# Altium PCB PCB1.PcbDoc (part 2 of 2)
Units mm, origin at the board's own origin, x right, y up, seen from the top; angles counter-clockwise.
Board outline 55 x 45 mm, 2 copper layers (Top Layer, Bottom Layer); 82 components, 65 nets, 333 pads, 91 vias.
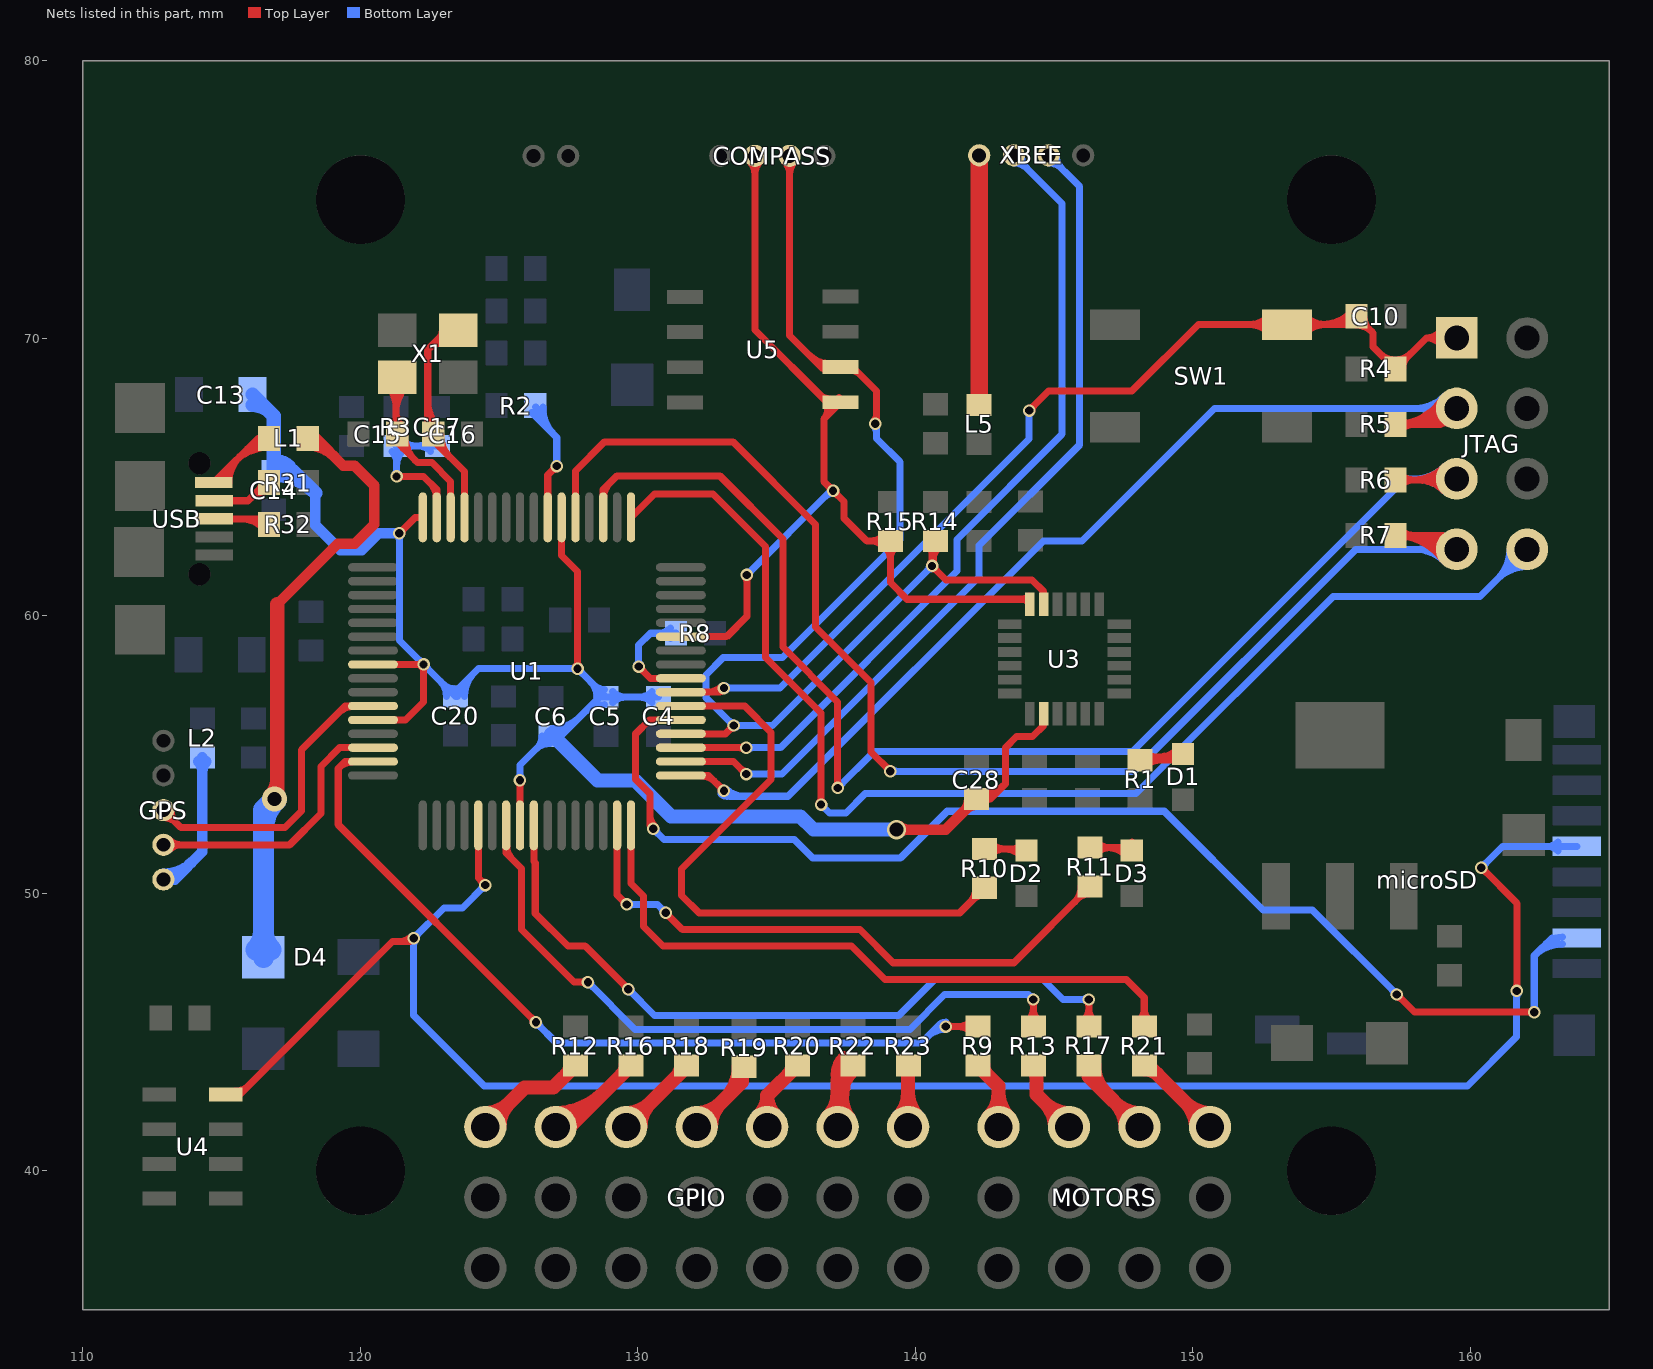
[diagram p2: the nets of this part, all layers, seen from the top]

## Via types
v1: diameter 0.45, hole 0.3, Top Layer to Bottom Layer, 69 vias
v2: diameter 0.7, hole 0.4, Top Layer to Bottom Layer, 17 vias
v3: diameter 1.27, hole 0.762, Top Layer to Bottom Layer, 1 vias
v4: diameter 1.3, hole 0.6, Top Layer to Bottom Layer, 1 vias
v5: diameter 0.9, hole 0.5, Top Layer to Bottom Layer, 1 vias
v6: diameter 0.9, hole 0.6, Top Layer to Bottom Layer, 1 vias
v7: diameter 0.7, hole 0.5, Top Layer to Bottom Layer, 1 vias

## Nets (pads, with @x,y where several pads share a name; then routed paths per layer and width w, separated by ;. In a path a pad name is that pad's centre, name@x,y a point inside that pad or via, vN(x,y) a via of type N, cw(c..) or ccw(c..) an arc to the next point about the centre after c; other vN are vias at no path point) (continued)
NetD1_2: D1.2 R1.2 | length 5.2
  Top Layer w0.254: R1.2@148.1,54.8 D1.2@149.425,54.8 ; R1.2@148.287,55.036 ccw(c148.748,55.835) 148.986,54.944 ; R1.2@148.343,54.607 cw(c148.809,54.141) 148.809,54.8 cw(c148.809,55.459) R1.2@148.343,54.993 ; R1.2@148.386,54.663 cw(c148.729,54.466) 148.627,54.848 ; R1.2@148.448,54.8 ccw(c148.448,56.227) D1.2@149.457,55.218 ; 149.061,54.8 ccw(c149.061,55.614) D1.2@149.637,55.038
NetD2_2: D2.2 R10.2 | length 3.4
  Top Layer w0.254: R10.2@142.5,51.6 D2.2@143.8,51.6 ; R10.2@142.743,51.407 cw(c143.209,50.941) 143.209,51.6 cw(c143.209,52.259) R10.2@142.743,51.793 ; 143.22,51.6 cw(c143.22,50.77) D2.2@143.807,51.357 ; 143.462,51.6 ccw(c143.462,52.088) D2.2@143.807,51.743
NetD3_2: D3.2 R11.2 | length 3.7
  Top Layer w0.254: R11.2@146.3,51.65 147.6,51.65 D3.2@147.8,51.85 ; R11.2@146.543,51.457 cw(c147.009,50.991) 147.009,51.65 cw(c147.009,52.309) R11.2@146.543,51.843 ; 146.899,51.65 cw(c146.899,50.649) D3.2@147.607,51.357 ; 147.382,51.65 ccw(c147.382,51.968) D3.2@147.607,51.743
NetD4_1: D4.1 L1.2 | length 26.5
  Top Layer w0.381: 117,60.422 119.178,62.6 119.8,62.6 120.5,63.3 120.5,64.7 119.784,65.416 119.385,65.416 118.4,66.4 L1.2@118.1,66.4 ; L1.2@118.1,66.141 cw(c118.1,64.79) 119.055,65.745
  Top Layer w0.508: v5@116.761,53.539 ccw(c116.185,54.115) 117,54.115 ; v5(116.9,53.4) 117,53.5 117,60.422
  Bottom Layer w0.762: D4.1@116.231,47.969 ccw(c115.58,48.62) 116.5,48.62 ccw(c117.42,48.62) D4.1@116.769,47.969 ; D4.1@116.5,47.7 116.5,53 v5(116.9,53.4) ; 116.5,52.268 cw(c118.032,52.268) v5@116.949,53.351
NetL1_1: L1.1 USB.1 | length 6.6
  Top Layer w0.254: USB.1@114.708,64.802 116.306,66.4 L1.1@116.7,66.4 ; USB.1@114.748,64.802 cw(c114.845,64.802) USB.1@114.776,64.87 ; USB.1@115.002,64.802 cw(c115.712,64.802) 115.21,65.304 ; USB.1@115.256,64.802 cw(c116.579,64.802) 115.643,65.737 ; 115.476,65.57 cw(c116.7,64.346) L1.1@116.7,66.077 ; 115.91,66.004 cw(c116.7,65.213) L1.1@116.7,66.331
NetL2_1: GPS.1 L2.1 | length 7.2
  Bottom Layer w0.381: GPS.1@112.9,50.5 113.3,50.5 114.3,51.5 L2.1@114.3,54.9 ; GPS.1@112.9,50.709 ccw(c112.9,52.181) 113.94,51.14 ; L2.1@114.152,54.752 cw(c113.794,54.394) 114.3,54.394 cw(c114.806,54.394) L2.1@114.448,54.752
NetL5_1: L5.1 XBEE.1 | length 9
  Top Layer w0.635: L5.1@142.3,67.6 XBEE.1@142.3,76.6
NetP1_2: R31.1 USB.2 | length 3.5
  Top Layer w0.254: USB.2@114.725,64.15 115.95,64.15 116.6,64.8 R31.1@116.9,64.8 ; 115.978,64.178 cw(c116.7,63.456) R31.1@116.7,64.477 ; R31.1@116.34,64.54 ccw(c116.13,64.75) R31.1@116.427,64.75
NetP1_3: R32.1 USB.3 | length 3.7
  Top Layer w0.254: USB.3@114.725,63.5 116.6,63.5 R32.1@116.9,63.2 ; 115.679,63.5 cw(c115.679,62.329) R32.1@116.507,63.157 ; 116.292,63.5 cw(c116.292,62.942) R32.1@116.687,63.337
NetP6_3: GPIO.3 R12.2 | length 6.5
  Top Layer w0.508: GPIO.3@124.5,41.58 125.92,43 126.95,43 R12.2@127.75,43.8 ; GPIO.3@124.5,42.088 ccw(c124.5,43.314) 125.367,42.447 ccw(c126.234,41.58) GPIO.3@125.008,41.58 ; R12.2@127.415,43.465 ccw(c127.081,43.8) R12.2@127.554,43.8
NetP6_6: GPIO.6 R16.2 | length 6.8
  Top Layer w0.508: GPIO.6@127.04,42.088 ccw(c127.04,44.497) 128.744,42.794 ; 127.877,41.927 cw(c127.04,42.763) GPIO.6@127.04,41.58 127.53,41.58 R16.2@129.75,43.8 ; R16.2@129.415,43.465 ccw(c129.081,43.8) R16.2@129.554,43.8
NetP6_9: GPIO.9 R18.2 | length 5.5
  Top Layer w0.508: GPIO.9@129.58,41.58 131.75,43.75 R18.2@131.75,43.8 ; GPIO.9@129.58,42.088 ccw(c129.58,43.314) 130.447,42.447 ccw(c131.314,41.58) GPIO.9@130.088,41.58 ; 131.38,43.38 ccw(c130.96,43.8) R18.2@131.554,43.8
NetP6_12: GPIO.12 R19.2 | length 6.4
  Top Layer w0.508: GPIO.12@132.12,41.58 133.75,43.21 133.75,43.67 R19.2@133.83,43.75 ; GPIO.12@132.12,42.088 ccw(c132.12,43.314) 132.987,42.447 ccw(c133.854,41.58) GPIO.12@132.628,41.58 ; 133.17,42.63 ccw(c132.05,43.75) R19.2@133.634,43.75 ; 133.75,43.325 cw(c134.205,43.325) R19.2@133.883,43.647
NetP6_15: GPIO.15 R20.2 | length 4.7
  Top Layer w0.508: GPIO.15@134.323,41.96 ccw(c133.657,42.71) 134.66,42.71 ; GPIO.15@134.66,41.58 134.66,42.71 ; GPIO.15@134.997,41.96 cw(c135.663,42.71) 134.66,42.71 ; R20.2@135.415,43.465 ccw(c135.081,43.8) R20.2@135.554,43.8 ; R20.2@135.75,43.8 134.66,42.71
NetP6_18: GPIO.18 R22.2 | length 9.5
  Top Layer w0.508: GPIO.18@136.841,41.939 ccw(c135.974,42.806) 137.2,42.806 ccw(c138.426,42.806) GPIO.18@137.559,41.939 ; GPIO.18@136.946,42.02 ccw(c136.625,42.577) 137.246,42.41 ; GPIO.18@137.2,41.58 137.2,43.25 R22.2@137.75,43.8 ; GPIO.18@137.2,42.24 cw(c139.26,42.24) R22.2@137.803,43.697 ; 137.2,43.057 cw(c137.805,43.057) R22.2@137.72,43.655 ; 137.2,43.467 cw(c138.033,43.467) R22.2@137.444,44.056 ; 137.399,42.984 ccw(c138.647,42.65) GPIO.18@137.608,41.882 ; R22.2@137.415,43.465 ccw(c137.081,43.8) R22.2@137.554,43.8
NetP6_21: GPIO.21 R23.2 | length 4.1
  Top Layer w0.508: GPIO.21@139.381,41.939 ccw(c138.514,42.806) 139.74,42.806 ccw(c140.966,42.806) GPIO.21@140.099,41.939 ; GPIO.21@139.74,41.58 R23.2@139.74,43.79
NetP7_3: MOTORS.3 R9.2 | length 4.8
  Top Layer w0.508: R9.2@142.25,43.8 143,43.05 MOTORS.3@143,41.58 ; R9.2@142.446,43.8 ccw(c142.919,43.8) R9.2@142.585,43.465 ; MOTORS.3@142.641,41.939 ccw(c141.774,42.806) 143,42.806 ccw(c144.226,42.806) MOTORS.3@143.359,41.939
NetP7_6: MOTORS.6 R13.2 | length 5.3
  Top Layer w0.508: R13.2@144.197,43.697 cw(c143.779,43.279) 144.37,43.279 ; R13.2@144.37,43.68 144.37,42.75 MOTORS.6@145.54,41.58 MOTORS.6@145.17,41.58 ; MOTORS.6@145.032,41.58 ccw(c143.806,41.58) 144.673,42.447 ccw(c145.54,43.314) MOTORS.6@145.54,42.088
NetP7_9: MOTORS.9 R17.2 | length 6
  Top Layer w0.508: R17.2@146.25,43.8 146.25,43.41 MOTORS.9@148.08,41.58 ; R17.2@146.446,43.8 ccw(c147.861,43.8) 146.86,42.8 ; MOTORS.9@147.572,41.58 ccw(c146.346,41.58) 147.213,42.447 ccw(c148.08,43.314) MOTORS.9@148.08,42.088
NetP7_12: MOTORS.12 R21.2 | length 5.5
  Top Layer w0.508: R21.2@148.3,43.654 cw(c148.3,43.06) 148.72,43.48 ; R21.2@148.4,43.8 MOTORS.12@150.62,41.58 ; MOTORS.12@150.112,41.58 ccw(c148.886,41.58) 149.753,42.447 ccw(c150.62,43.314) MOTORS.12@150.62,42.088
NetR2_2: R2.2 U1.55 | length 6.8
  Top Layer w0.254: U1.55@126.75,63.55 126.75,65.075 v1(127.075,65.4) ; v1@126.977,65.4 cw(c126.74,65.4) 126.908,65.233 cw(c127.075,65.065) v1@127.075,65.302
  Bottom Layer w0.254: R2.2@126.163,67.338 127.075,66.425 v1(127.075,65.4) ; R2.2@126.319,67.525 ccw(c127.15,67.525) 126.562,66.938 ; R2.2@126.573,67.525 ccw(c128.017,67.525) 126.996,66.504 ; v1@127.006,65.469 ccw(c126.838,65.637) 127.075,65.637 ccw(c127.312,65.637) v1@127.144,65.469
NetR8_2: R8.2 U1.40 | length 5.8
  Top Layer w0.254: v1@130.025,58.077 cw(c130.025,57.84) 130.192,58.008 cw(c130.36,58.175) v1@130.123,58.175 ; v1(130.025,58.175) 130.45,57.75 U1.40@131.55,57.75
  Bottom Layer w0.254: v1@129.956,58.244 ccw(c129.788,58.412) 130.025,58.412 ccw(c130.262,58.412) v1@130.094,58.244 ; v1(130.025,58.175) 130.025,58.95 130.45,59.375 R8.2@131.375,59.375 ; R8.2@131.182,59.182 ccw(c130.716,58.716) 130.716,59.375 ccw(c130.716,60.034) R8.2@131.182,59.568
NRST: C10.2 JTAG.1 R4.1 SW1.3 U1.39 | length 46.5
  Top Layer w0.254: U1.39@131.55,57.25 132.95,57.25 v1(133.1,57.4) ; 132.501,57.25 ccw(c132.501,57.999) v1@133.031,57.469 ; v1(144.1,67.4) 144.8,68.1 147.8,68.1 150.2,70.5 SW1.3@153.4,70.5 C10.2@155.6,70.5 ; v1@144.1,67.498 ccw(c144.1,67.735) 144.267,67.567 ccw(c144.435,67.4) v1@144.198,67.4 ; SW1.3@152.751,70.201 ccw(c152.029,69.479) 152.029,70.5 ccw(c152.029,71.521) SW1.3@152.751,70.799 ; SW1.3@154.049,70.201 cw(c154.771,69.479) 154.771,70.5 cw(c154.771,71.521) SW1.3@154.049,70.799 ; 154.637,70.5 ccw(c154.637,72.013) C10.2@155.707,70.943 ; 155.251,70.5 ccw(c155.251,71.399) C10.2@155.887,70.763 ; C10.2@155.9,70.477 cw(c155.9,69.697) 156.451,70.249 ; C10.2@155.9,70.8 156.5,70.2 156.5,69.7 R4.1@157.3,68.9 158.42,70.02 ; C10.2@156.173,70.75 ccw(c156.711,70.75) 156.331,70.369 ; 156.749,69.451 ccw(c157.3,70.003) 157.3,69.223 ccw(c157.3,70.003) 157.851,69.451 ; 156.869,69.331 cw(c156.489,68.95) R4.1@157.027,68.95 ; R4.1@157.573,68.95 cw(c158.111,68.95) 157.731,69.331 ; JTAG.1@158.976,69.703 ccw(c158.42,69.374) 158.42,70.02 ; JTAG.1@158.976,70.337 cw(c158.42,70.666) 158.42,70.02 ; JTAG.1@159.512,70.02 158.42,70.02
  Bottom Layer w0.254: v1(133.1,57.4) 135.124,57.4 144.1,66.376 v1(144.1,67.4) ; v1@133.169,57.331 cw(c133.337,57.163) 133.337,57.4 cw(c133.337,57.637) v1@133.169,57.469 ; v1@144.031,67.331 cw(c143.863,67.163) 144.1,67.163 cw(c144.337,67.163) v1@144.169,67.331
PA7: R10.1 U1.38 | length 23.6
  Top Layer w0.254: U1.38@131.55,56.75 133.85,56.75 134.8,55.8 134.8,54.1 131.572,50.872 131.572,49.928 132.2,49.3 141.6,49.3 R10.1@142.5,50.2 R10.1@142.3,50.2 ; 141.949,49.649 ccw(c141.397,50.2) R10.1@142.177,50.2 ; 142.069,49.769 cw(c142.45,49.389) R10.1@142.45,49.927
PA8: R11.1 U1.31 | length 24.2
  Top Layer w0.254: U1.31@129.25,52.45 129.25,49.95 v1(129.6,49.6) ; v1@129.502,49.6 ccw(c129.265,49.6) 129.433,49.767 ccw(c129.6,49.935) v1@129.6,49.698 ; v1@131,49.202 cw(c131,48.965) 131.167,49.133 cw(c131.335,49.3) v1@131.098,49.3 ; v1(131,49.3) 131.6,48.7 138,48.7 139.2,47.5 143.55,47.5 R11.1@146.3,50.25 ; 145.749,49.699 ccw(c145.197,50.25) R11.1@145.977,50.25 ; 145.869,49.819 cw(c146.25,49.439) R11.1@146.25,49.977
  Bottom Layer w0.254: v1(129.6,49.6) 130.7,49.6 v1(131,49.3) ; v1@129.669,49.531 cw(c129.837,49.363) 129.837,49.6 cw(c129.837,49.837) v1@129.669,49.669 ; v1@130.902,49.3 ccw(c130.665,49.3) 130.833,49.467 ccw(c131,49.635) v1@131,49.398
PA27: microSD.1 U1.37 | length 48.5
  Top Layer w0.254: 130.429,52.867 ccw(c131.099,52.867) v1@130.625,52.393 ; v1(130.556,52.324) 130.429,52.451 130.429,53.594 129.921,54.102 129.921,55.753 130.418,56.25 U1.37@131.55,56.25 ; v1@157.353,46.257 cw(c157.353,46.02) 157.52,46.188 cw(c157.688,46.355) v1@157.451,46.355 ; v1(157.353,46.355) 157.988,45.72 v1(162.306,45.72) ; v1@162.237,45.651 ccw(c162.069,45.483) 162.069,45.72 ccw(c162.069,45.957) v1@162.237,45.789
  Bottom Layer w0.254: v1@130.556,52.226 cw(c130.556,51.989) 130.723,52.157 cw(c130.891,52.324) v1@130.654,52.324 ; v1(130.556,52.324) 130.937,51.943 135.636,51.943 136.296,51.283 139.471,51.283 141.148,52.959 148.971,52.959 152.527,49.403 154.305,49.403 v1(157.353,46.355) ; v1@157.255,46.355 ccw(c157.018,46.355) 157.186,46.522 ccw(c157.353,46.69) v1@157.353,46.453 ; v1@162.237,45.789 ccw(c162.069,45.957) 162.306,45.957 ccw(c162.543,45.957) v1@162.375,45.789 ; v1(162.306,45.72) 162.306,47.752 ; 162.738,48.184 cw(c163.313,47.608) microSD.1@163.316,48.422 ; 162.945,48.391 162.306,47.752 ; microSD.1@163.315,48.168 ccw(c163.31,46.748) 162.306,47.752
PLLRC: C17.2 R3.2 U1.63 | length 9.5
  Top Layer w0.254: v1(121.3,65.025) 122.275,65.025 122.75,64.55 U1.63@122.75,63.55 ; v1@121.369,64.956 cw(c121.537,64.788) 121.537,65.025 cw(c121.537,65.262) v1@121.369,65.094 ; 122.534,64.766 cw(c122.068,64.3) U1.63@122.727,64.3
  Bottom Layer w0.254: R3.2@121.132,65.932 cw(c120.726,65.526) 121.3,65.526 ; v1@121.231,65.094 ccw(c121.063,65.262) 121.3,65.262 ccw(c121.537,65.262) v1@121.369,65.094 ; R3.2@121.275,66.125 C17.2@122.775,66.125 ; v1(121.3,65.025) R3.2@121.3,66 ; 121.3,65.406 cw(c122.044,65.406) 121.518,65.932 cw(c121.984,65.466) 121.984,66.125 cw(c121.984,66.784) R3.2@121.518,66.318 ; C17.2@122.532,65.932 ccw(c122.066,65.466) 122.066,66.125 ccw(c122.066,66.784) C17.2@122.532,66.318
PWM0: R9.1 U1.15 | length 34
  Top Layer w0.254: 119.234,54.534 cw(c119.7,54.068) U1.15@119.7,54.727 ; U1.15@120.45,54.75 119.45,54.75 119.2,54.5 119.2,52.475 v1(126.325,45.35) ; v1@126.227,45.35 ccw(c125.99,45.35) 126.158,45.517 ccw(c126.325,45.685) v1@126.325,45.448 ; v1(141.1,45.2) R9.1@142.25,45.2 ; v1@141.169,45.131 cw(c141.337,44.963) 141.337,45.2 cw(c141.337,45.437) v1@141.169,45.269 ; R9.1@142.007,45.007 ccw(c141.541,44.541) 141.541,45.2 ccw(c141.541,45.859) R9.1@142.007,45.393
  Bottom Layer w0.254: v1@126.325,45.252 cw(c126.325,45.015) 126.492,45.183 cw(c126.66,45.35) v1@126.423,45.35 ; v1(126.325,45.35) 127.075,44.6 140.2,44.6 140.8,45.2 v1(141.1,45.2) ; 140.421,44.821 cw(c141.1,44.141) v1@141.1,45.102 ; 140.854,45.254 cw(c141.1,45.008) v1@141.1,45.356 ; v1@141.031,45.131 ccw(c140.863,44.963) 140.863,45.2 ccw(c140.863,45.437) v1@141.031,45.269
PWM1: R13.1 U1.23 | length 28.5
  Top Layer w0.254: U1.23@125.25,52.45 125.25,51.45 125.8,50.9 125.8,48.7 127.7,46.8 v1(128.2,46.8) ; U1.23@125.273,51.7 ccw(c125.932,51.7) 125.466,51.234 ; v1@128.131,46.731 ccw(c127.963,46.563) 127.963,46.8 ccw(c127.963,47.037) v1@128.131,46.869 ; R13.1@144.057,45.393 ccw(c143.591,45.859) 144.25,45.859 ccw(c144.909,45.859) R13.1@144.443,45.393 ; v1@144.181,46.106 cw(c144.013,45.938) 144.25,45.938 cw(c144.487,45.938) v1@144.319,46.106 ; R13.1@144.25,45.2 v1(144.25,46.175)
  Bottom Layer w0.254: v1@128.2,46.702 cw(c128.2,46.465) 128.367,46.633 cw(c128.535,46.8) v1@128.298,46.8 ; v1(128.2,46.8) 129.9,45.1 139.8,45.1 141.055,46.355 144.07,46.355 v1(144.25,46.175) ; v1@144.152,46.175 ccw(c143.915,46.175) 144.083,46.342 ccw(c144.25,46.51) v1@144.25,46.273
PWM2: R17.1 U1.25 | length 29
  Top Layer w0.254: U1.25@126.25,52.45 126.25,51.15 126.3,51.1 126.3,49.275 127.475,48.1 128.1,48.1 v1(129.65,46.55) ; v1@129.552,46.55 ccw(c129.315,46.55) 129.483,46.717 ccw(c129.65,46.885) v1@129.65,46.648 ; R17.1@146.057,45.393 ccw(c145.591,45.859) 146.25,45.859 ccw(c146.909,45.859) R17.1@146.443,45.393 ; v1@146.181,46.106 cw(c146.013,45.938) 146.25,45.938 cw(c146.487,45.938) v1@146.319,46.106 ; R17.1@146.25,45.2 v1(146.25,46.175)
  Bottom Layer w0.254: v1@129.65,46.452 cw(c129.65,46.215) 129.817,46.383 cw(c129.985,46.55) v1@129.748,46.55 ; v1(129.65,46.55) 130.6,45.6 139.4,45.6 140.7,46.9 144.6,46.9 145.325,46.175 v1(146.25,46.175) ; v1@146.181,46.106 ccw(c146.013,45.938) 146.013,46.175 ccw(c146.013,46.412) v1@146.181,46.244
PWM3: R21.1 U1.32 | length 25
  Top Layer w0.254: U1.32@129.75,52.45 129.75,50.35 130.2,49.9 130.2,48.8 130.9,48.1 137.7,48.1 138.9,46.9 147.6,46.9 148.25,46.25 R21.1@148.25,45.2 ; R21.1@148.057,45.393 ccw(c147.591,45.859) 148.25,45.859 ccw(c148.909,45.859) R21.1@148.443,45.393
RXD0: U1.35 XBEE.2 | length 31.6
  Top Layer w0.254: U1.35@131.55,55.25 v1(133.9,55.25) ; v1@133.831,55.181 ccw(c133.663,55.013) 133.663,55.25 ccw(c133.663,55.487) v1@133.831,55.319
  Bottom Layer w0.254: v1(133.9,55.25) 135.133,55.25 141.5,61.617 141.5,62.76 145.288,66.548 145.288,74.862 XBEE.2@143.55,76.6 ; v1@133.969,55.181 cw(c134.137,55.013) 134.137,55.25 cw(c134.137,55.487) v1@133.969,55.319 ; XBEE.2@143.55,76.327 cw(c143.55,75.668) 144.016,76.134 cw(c144.482,76.6) XBEE.2@143.823,76.6
RXD1: GPS.3 U1.11 | length 12.5
  Top Layer w0.254: GPS.3@112.9,52.727 cw(c112.9,52.068) 113.366,52.534 cw(c113.832,53) GPS.3@113.173,53 ; GPS.3@112.9,53 113.525,52.375 117.275,52.375 117.875,52.975 117.875,55.175 119.45,56.75 U1.11@120.45,56.75 ; 119.234,56.534 cw(c119.7,56.068) U1.11@119.7,56.727
SCL: COMPASS.3 R14.2 U1.36 U3.23 U5.6 | length 51.9
  Top Layer w0.254: U1.36@131.55,55.75 133.15,55.75 v1(133.45,56.05) ; v1@133.352,56.05 cw(c133.115,56.05) 133.283,55.883 cw(c133.45,55.715) v1@133.45,55.952 ; COMPASS.3@135.276,76.388 cw(c134.81,75.922) 135.469,75.922 cw(c136.128,75.922) COMPASS.3@135.662,76.388 ; COMPASS.3@135.469,76.581 135.469,70.106 136.605,68.97 ; 136.186,69.389 ccw(c136.9,70.102) U5.6@136.9,69.093 ; 136.62,68.955 ccw(c136.9,69.235) U5.6@136.9,68.839 ; U5.6@136.813,68.883 ccw(c136.605,68.678) 136.605,68.97 ; U5.6@136.813,69.057 cw(c136.605,69.262) 136.605,68.97 ; U5.6@137.7,68.847 cw(c137.7,68.478) 137.961,68.739 ; v1@138.488,66.998 ccw(c138.217,67.269) 138.6,67.269 ; v1@138.6,66.929 138.6,68.1 137.73,68.97 U5.6@137.3,68.97 136.605,68.97 ; R14.2@140.482,62.507 cw(c140.197,62.222) 140.6,62.222 ; v1@140.531,61.869 ccw(c140.363,62.037) 140.6,62.037 ccw(c140.837,62.037) v1@140.669,61.869 ; v1@140.6,61.702 cw(c140.6,61.465) 140.767,61.633 cw(c140.935,61.8) v1@140.698,61.8 ; v1@140.6,61.86 cw(c141.515,61.86) R14.2@140.868,62.507 ; 140.656,62.069 ccw(c140.936,61.994) v1@140.685,61.849 ; R14.2@140.8,62.7 140.6,62.7 v1(140.6,61.8) 141.1,61.3 144.2,61.3 144.625,60.875 U3.23@144.625,60.425
  Bottom Layer w0.254: v1@133.352,56.05 ccw(c133.115,56.05) 133.283,56.217 ccw(c133.45,56.385) v1@133.45,56.148 ; v1@133.519,55.981 cw(c133.687,55.813) 133.687,56.05 cw(c133.687,56.287) v1@133.519,56.119 ; v1@138.488,66.86 cw(c138.217,66.589) 138.6,66.589 ; v1(138.557,66.929) 138.6,66.886 138.6,66.4 139.446,65.554 139.446,62.738 135.208,58.5 133.075,58.5 132.45,57.875 132.45,57.05 v1(133.45,56.05) 134.85,56.05 v1(140.6,61.8) ; v1@140.502,61.8 cw(c140.265,61.8) 140.433,61.633 cw(c140.6,61.465) v1@140.6,61.702
SDA: COMPASS.2 R15.2 U1.43 U3.24 U5.5 | length 39.6
  Top Layer w0.254: U1.43@131.55,59.25 133.2,59.25 133.925,59.975 v1(133.925,61.475) ; v1@133.856,61.406 cw(c133.688,61.238) 133.925,61.238 cw(c134.162,61.238) v1@133.994,61.406 ; COMPASS.2@134.026,76.388 cw(c133.56,75.922) 134.219,75.922 cw(c134.878,75.922) COMPASS.2@134.412,76.388 ; COMPASS.2@134.219,76.581 134.219,70.306 136.825,67.7 U5.5@137.3,67.7 136.7,67.1 ; 136.562,67.963 ccw(c136.9,68.301) U5.5@136.9,67.823 ; U5.5@136.79,67.645 cw(c136.365,67.435) 136.7,67.1 ; v1@136.935,64.516 ccw(c136.698,64.516) 136.866,64.683 ccw(c137.033,64.851) v1@137.033,64.614 ; 136.95,67.35 ccw(c136.7,67.601) U5.5@137.017,67.758 ; v1@137.033,64.418 cw(c137.033,64.181) 137.2,64.349 cw(c137.368,64.516) v1@137.131,64.516 ; U5.5@137.201,67.601 ccw(c137.035,67.767) U5.5@137.245,67.871 ; R15.2@138.857,62.507 ccw(c138.391,62.041) 138.391,62.7 ccw(c138.391,63.359) R15.2@138.857,62.893 ; R15.2@138.907,62.507 cw(c138.441,62.041) 139.1,62.041 cw(c139.759,62.041) R15.2@139.293,62.507 ; 143.828,60.6 ccw(c143.828,60.972) U3.24@144.091,60.709 ; U3.24@144.08,60.691 cw(c143.95,60.738) 143.95,60.6 ; U3.24@144.125,60.425 143.95,60.6 ; 136.7,67.1 136.7,64.849 v1(137.033,64.516) 137.432,64.117 137.432,63.518 138.25,62.7 R15.2@139.1,62.7 139.1,61.2 139.7,60.6 143.95,60.6
  Bottom Layer w0.254: v1(133.925,61.475) 136.966,64.516 v1(137.033,64.516) ; v1@133.925,61.573 ccw(c133.925,61.81) 134.092,61.642 ccw(c134.26,61.475) v1@134.023,61.475 ; 136.751,64.301 cw(c137.033,64.02) v1@137.033,64.418
SPCK: microSD.4 U1.21 U4.8 | length 75.1
  Top Layer w0.254: U4.8@115.15,42.75 115.65,42.75 121.159,48.259 v1@121.792,48.259 ; U4.8@115.5,42.873 ccw(c115.5,43.532) 115.966,43.066 ; 121.374,48.259 ccw(c121.374,48.933) v1@121.851,48.456 ; U1.21@124.25,52.45 124.25,50.55 v1(124.5,50.3) ; v1@124.402,50.3 ccw(c124.165,50.3) 124.333,50.467 ccw(c124.5,50.635) v1@124.5,50.398 ; v1@160.401,50.829 cw(c160.401,50.592) 160.568,50.76 cw(c160.736,50.927) v1@160.499,50.927 ; v1(160.401,50.927) 161.686,49.642 161.686,46.497 v1(161.671,46.482) ; v1@161.602,46.551 ccw(c161.398,46.755) 161.686,46.755
  Bottom Layer w0.254: v1@121.851,48.318 cw(c121.683,48.15) 121.92,48.15 cw(c122.157,48.15) v1@121.989,48.318 ; v1@121.92,48.485 ccw(c121.92,48.722) 122.087,48.554 ccw(c122.255,48.387) v1@122.018,48.387 ; v1@124.402,50.3 cw(c124.165,50.3) 124.333,50.133 cw(c124.5,49.965) v1@124.5,50.202 ; v1(124.5,50.3) 123.675,49.475 123.008,49.475 v1(121.92,48.387) 121.92,45.593 124.46,43.053 159.893,43.053 161.671,44.831 v1(161.671,46.482) ; v1(160.401,50.927) 161.163,51.689 microSD.4@163.574,51.689 ; v1@160.401,51.025 ccw(c160.401,51.262) 160.568,51.094 ccw(c160.736,50.927) v1@160.499,50.927 ; v1@161.602,46.413 cw(c161.434,46.245) 161.671,46.245 cw(c161.908,46.245) v1@161.74,46.413 ; 162.773,51.689 ccw(c162.773,52.234) microSD.4@163.158,51.849 ; 162.782,51.689 cw(c162.782,51.157) microSD.4@163.158,51.533 ; microSD.4@163.121,51.584 ccw(c162.939,51.484) 162.939,51.691 ; microSD.4@163.121,51.798 cw(c162.939,51.898) 162.939,51.691 ; microSD.4@163.841,51.691 162.939,51.691
TCK: JTAG.4 R7.1 U1.53 | length 59.6
  Top Layer w0.254: U1.53@127.75,63.55 127.75,65.225 128.8,66.275 133.425,66.275 136.4,63.3 136.4,59.6 138.4,57.6 138.4,55.1 v1(139.1,54.4) ; v1@139.002,54.4 ccw(c138.765,54.4) 138.933,54.567 ccw(c139.1,54.735) v1@139.1,54.498 ; R7.1@157.493,62.707 cw(c157.959,62.241) 157.959,62.9 cw(c157.959,63.559) R7.1@157.493,63.093 ; 157.8,62.9 cw(c157.8,61.149) JTAG.4@159.214,62.182 ; 158.301,62.9 cw(c158.301,61.515) JTAG.4@159.419,62.332 ; 158.801,62.9 cw(c158.801,61.88) JTAG.4@159.624,62.482 ; JTAG.4@159.009,62.032 ccw(c157.3,60.783) R7.1@157.3,62.9 159.012,62.9 JTAG.4@159.512,62.4
  Bottom Layer w0.254: v1(139.1,54.4) 147.872,54.4 155.872,62.4 JTAG.4@159.512,62.4 ; v1@139.169,54.331 cw(c139.337,54.163) 139.337,54.4 cw(c139.337,54.637) v1@139.169,54.469 ; JTAG.4@159.071,61.959 ccw(c158.008,60.896) 158.008,62.4 ccw(c158.008,63.904) JTAG.4@159.071,62.841 ; JTAG.4@159.251,62.139 ccw(c158.621,61.509) 158.621,62.4 ccw(c158.621,63.291) JTAG.4@159.251,62.661
TDI: JTAG.2 R5.1 U1.33 | length 50.2
  Top Layer w0.254: U1.33@131.55,54.25 132.55,54.25 v1(133.1,53.7) v1@133.1,53.8 ; U1.33@132.3,54.227 cw(c132.3,53.568) 132.766,54.034 ; v1@133.002,53.7 ccw(c132.765,53.7) 132.933,53.867 ccw(c133.1,54.035) v1@133.1,53.798 ; R5.1@157.493,66.707 cw(c157.959,66.241) 157.959,66.9 cw(c157.959,67.559) R5.1@157.493,67.093 ; 157.767,66.9 ccw(c157.767,68.61) JTAG.2@159.202,67.681 ; 158.234,66.9 ccw(c158.234,68.307) JTAG.2@159.415,67.542 ; 158.701,66.9 ccw(c158.701,68.005) JTAG.2@159.629,67.404 ; JTAG.2@158.969,67.174 cw(c158.77,67.062) 158.932,66.9 ; JTAG.2@158.989,67.819 cw(c157.3,68.912) R5.1@157.3,66.9 158.932,66.9 ; JTAG.2@159.206,66.937 ccw(c159.094,66.738) 158.932,66.9 ; JTAG.2@159.512,67.48 158.932,66.9
  Bottom Layer w0.254: v1@132.99,53.59 ccw(c133.206,53.806) 133.206,53.5 ; v1@133.1,53.8 v1(133.1,53.7) 133.3,53.5 135.415,53.5 144.615,62.7 146,62.7 150.78,67.48 JTAG.2@159.512,67.48 ; v1@133.169,53.769 ccw(c133.819,54.419) 133.819,53.5 ; JTAG.2@159.071,67.039 ccw(c158.008,65.976) 158.008,67.48 ccw(c158.008,68.984) JTAG.2@159.071,67.921 ; JTAG.2@159.251,67.219 ccw(c158.621,66.589) 158.621,67.48 ccw(c158.621,68.371) JTAG.2@159.251,67.741
TDO: JTAG.8 U1.49 | length 50.1
  Top Layer w0.254: U1.49@129.75,63.55 130.6,64.4 132.7,64.4 134.6,62.5 134.6,58.5 136.6,56.5 v1(136.6,53.2) ; v1@136.531,53.269 ccw(c136.363,53.437) 136.6,53.437 ccw(c136.837,53.437) v1@136.669,53.269
  Bottom Layer w0.254: v1@136.6,53.102 cw(c136.6,52.865) 136.767,53.033 cw(c136.935,53.2) v1@136.698,53.2 ; v1(136.6,53.2) 136.9,52.9 137.5,52.9 138.194,53.594 147.955,53.594 155.061,60.7 160.352,60.7 JTAG.8@162.052,62.4 ; JTAG.8@161.429,62.4 cw(c159.925,62.4) 160.988,61.336 cw(c162.052,60.273) JTAG.8@162.052,61.777 ; JTAG.8@161.683,62.4 cw(c160.792,62.4) 161.422,61.77 cw(c162.052,61.14) JTAG.8@162.052,62.031
TMS: JTAG.3 R6.1 U1.51 | length 57.3
  Top Layer w0.254: U1.51@128.75,63.55 128.75,64.55 129.25,65.05 132.95,65.05 135.225,62.775 135.225,58.875 137.2,56.9 v1(137.2,53.8) ; U1.51@128.773,64.3 cw(c129.432,64.3) 128.966,64.766 ; v1@137.131,53.869 ccw(c136.963,54.037) 137.2,54.037 ccw(c137.437,54.037) v1@137.269,53.869 ; R6.1@157.3,64.9 JTAG.3@159.472,64.9 ; R6.1@157.493,64.707 cw(c157.959,64.241) 157.959,64.9 cw(c157.959,65.559) R6.1@157.493,65.093 ; 157.911,64.9 ccw(c157.911,66.541) JTAG.3@159.071,65.381 ; 158.105,64.9 cw(c158.105,63.533) JTAG.3@159.071,64.499 ; 158.525,64.9 ccw(c158.525,65.927) JTAG.3@159.251,65.201 ; 158.718,64.9 cw(c158.718,64.146) JTAG.3@159.251,64.679
  Bottom Layer w0.254: v1(137.2,53.8) 138.518,55.118 147.828,55.118 157.65,64.94 JTAG.3@159.512,64.94 ; v1@137.2,53.898 ccw(c137.2,54.135) 137.367,53.967 ccw(c137.535,53.8) v1@137.298,53.8 ; JTAG.3@159.071,64.499 ccw(c158.008,63.436) 158.008,64.94 ccw(c158.008,66.444) JTAG.3@159.071,65.381 ; JTAG.3@159.251,64.679 ccw(c158.621,64.049) 158.621,64.94 ccw(c158.621,65.831) JTAG.3@159.251,65.201
TXD0: U1.34 XBEE.3 | length 32.8
  Top Layer w0.254: U1.34@131.55,54.75 133.45,54.75 v1(133.9,54.3) ; v1@133.802,54.3 ccw(c133.565,54.3) 133.733,54.467 ccw(c133.9,54.635) v1@133.9,54.398
  Bottom Layer w0.254: v1(133.9,54.3) 135.199,54.3 142.3,61.401 142.3,62.544 145.923,66.167 145.923,75.477 XBEE.3@144.8,76.6 ; v1@133.969,54.231 cw(c134.137,54.063) 134.137,54.3 cw(c134.137,54.537) v1@133.969,54.369 ; XBEE.3@144.8,76.327 cw(c144.8,75.668) 145.266,76.134 cw(c145.732,76.6) XBEE.3@145.073,76.6
TXD1: GPS.2 U1.14 | length 11
  Top Layer w0.254: GPS.2@112.9,51.75 117.45,51.75 118.575,52.875 118.575,54.575 119.25,55.25 U1.14@120.45,55.25 ; GPS.2@113.093,51.557 cw(c113.559,51.091) 113.559,51.75 cw(c113.559,52.409) GPS.2@113.093,51.943
VDDOUT: C4.2 C5.2 C6.2 C13.2 C14.2 C20.2 C28.2 U1.8 U1.12 U1.24 U1.54 U1.64 U3.8 | length 84.6
  Top Layer w0.254: U1.12@120.45,56.25 121.625,56.25 122.275,56.9 v1(122.275,58.25) U1.8@120.45,58.25 ; v1(121.4,62.975) 121.975,63.55 U1.64@122.25,63.55 ; v1@121.4,63.073 ccw(c121.4,63.31) 121.567,63.142 ccw(c121.735,62.975) v1@121.498,62.975 ; v1@122.206,58.319 cw(c122.038,58.487) 122.038,58.25 cw(c122.038,58.013) 122.206,58.181 cw(c122.038,58.013) 122.275,58.013 cw(c122.512,58.013) v1@122.344,58.181 ; v1@125.681,54.006 cw(c125.513,53.838) 125.75,53.838 cw(c125.987,53.838) v1@125.819,54.006 ; U1.24@125.75,52.45 v1(125.75,54.075) ; U1.54@127.25,63.55 127.25,62.175 127.825,61.6 v1(127.825,58.1) ; v1@127.756,58.169 ccw(c127.588,58.337) 127.825,58.337 ccw(c128.062,58.337) v1@127.894,58.169 ; C28.2@142.2,53.4 142.7,53.4 ; C28.2@142.254,53.419 ccw(c142.402,54.133) 142.917,53.617 ; C28.2@142.305,53.667 ccw(c142.516,54.684) 143.25,53.95 ; C28.2@142.492,53.274 cw(c142.7,53.166) 142.7,53.4 ; C28.2@142.492,53.526 ccw(c142.7,53.634) 142.7,53.4 ; U3.8@144.625,56.475 144.625,56.05 144.225,55.65 143.65,55.65 143.25,55.25 143.25,53.95 ; 142.7,53.4 143.25,53.95
  Top Layer w0.381: v7(139.319,52.3) 141.1,52.3 C28.2@142.2,53.4 ; v7@139.432,52.187 cw(c139.704,51.915) 139.704,52.3 cw(c139.704,52.685) v7@139.432,52.413 ; 141.757,52.957 ccw(c141.314,53.4) C28.2@141.941,53.4 ; C28.2@141.878,53.078 cw(c142.15,52.805) C28.2@142.15,53.19
  Bottom Layer w0.254: v1@121.331,62.906 cw(c121.163,62.738) 121.4,62.738 cw(c121.637,62.738) v1@121.469,62.906 ; v1(121.4,62.975) 121.4,60.966 121.412,60.954 121.412,59.113 v1(122.275,58.25) C20.2@123.425,57.1 123.425,57.275 124.25,58.1 v1(127.825,58.1) C5.2@128.85,57.075 ; v1@122.177,58.25 ccw(c121.94,58.25) 122.108,58.417 ccw(c122.275,58.585) v1@122.275,58.348 ; v1@122.275,58.152 cw(c122.275,57.915) 122.442,58.083 cw(c122.61,58.25) v1@122.373,58.25 ; 122.874,57.651 cw(c122.322,57.1) C20.2@123.102,57.1 ; 122.994,57.531 ccw(c123.375,57.911) C20.2@123.375,57.373 ; C20.2@123.494,57.1 cw(c124.083,57.1) 123.667,57.517 ; C20.2@123.748,57.1 cw(c124.95,57.1) 124.1,57.95 ; v1@125.681,54.144 ccw(c125.513,54.312) 125.75,54.312 ccw(c125.987,54.312) v1@125.819,54.144 ; v1(125.75,54.075) 125.75,54.625 C6.2@126.875,55.75 ; 126.316,55.191 cw(c126.825,54.682) C6.2@126.825,55.402 ; 126.377,55.252 ccw(c125.953,55.675) C6.2@126.552,55.675 ; C6.2@126.875,55.675 127.225,55.675 128.625,57.075 C5.2@128.85,57.075 ; C6.2@126.925,55.694 ccw(c126.925,56.464) 127.47,55.92 ; C6.2@126.925,55.948 ccw(c126.925,57.331) 127.903,56.353 ; v1@127.756,58.031 ccw(c127.588,57.863) 127.588,58.1 ccw(c127.588,58.337) v1@127.756,58.169 ; v1@127.825,58.002 cw(c127.825,57.765) 127.992,57.933 cw(c128.16,58.1) v1@127.923,58.1 ; 128.035,56.485 cw(c128.8,55.721) C5.2@128.8,56.802 ; 128.299,57.626 cw(c127.747,57.075) C5.2@128.527,57.075 ; 128.419,57.506 ccw(c128.8,57.886) C5.2@128.8,57.348 ; C5.2@129.093,56.882 cw(c129.559,56.416) 129.559,57.075 cw(c129.559,57.734) C5.2@129.093,57.268 ; C4.2@130.507,56.882 ccw(c130.041,56.416) 130.041,57.075 ccw(c130.041,57.734) C4.2@130.507,57.268 ; C4.2@130.75,57.075 C5.2@128.85,57.075
  Bottom Layer w0.381: 118.375,64.425 118.375,63.275 119.275,62.375 120.05,62.375 120.65,62.975 v1(121.4,62.975)
  Bottom Layer w0.508: C13.2@116.111,67.594 cw(c116.111,66.674) 116.761,67.325 ; C13.2@116.111,67.975 116.875,67.211 C14.2@116.875,65.225 117.575,65.225 118.375,64.425 ; C14.2@116.925,65.079 cw(c116.925,63.157) 118.284,64.516 ; C14.2@116.925,65.587 cw(c116.925,64.892) 117.417,65.383 ; C6.2@126.875,55.75 128.55,54.075 129.9,54.075 131.2,52.775 135.85,52.775 136.325,52.3 v7(139.319,52.3)
XIN: C15.2 U1.62 X1.1 | length 11
  Top Layer w0.254: X1.1@120.991,68.266 cw(c120.304,67.579) 121.275,67.579 ; C15.2@121.132,66.793 ccw(c120.787,67.138) 121.275,67.138 ; 121.275,67.337 cw(c122.588,67.337) X1.1@121.659,68.266 ; 121.275,67.38 ccw(c122.105,67.38) C15.2@121.518,66.793 ; 121.275,67.951 cw(c121.974,67.951) X1.1@121.48,68.445 ; X1.1@121.275,68.55 121.275,66.55 121.275,66.3 122.05,65.525 122.575,65.525 123.25,64.85 U1.62@123.25,63.55 ; C15.2@121.344,66.5 ccw(c121.993,66.5) 121.534,66.041 ; C15.2@121.598,66.5 ccw(c122.861,66.5) 121.968,65.607
XOUT: C16.2 U1.61 X1.3 | length 12.4
  Top Layer w0.254: 122.425,67.129 ccw(c123.154,67.129) C16.2@122.638,66.613 ; 122.425,67.742 ccw(c123.767,67.742) C16.2@122.818,66.793 ; 122.74,69.915 cw(c123.207,69.448) X1.3@123.371,70.088 ; X1.3@122.83,70.005 ccw(c122.534,70.3) X1.3@122.952,70.3 ; C16.2@122.898,66.5 ccw(c123.979,66.5) 123.215,65.735 ; X1.3@123.308,69.842 ccw(c123.078,68.947) 122.425,69.6 ; X1.3@123.525,70.3 123.125,70.3 122.425,69.6 ; U1.61@123.75,63.55 123.75,65.2 122.625,66.325 C16.2@122.625,66.55 122.425,66.75 122.425,69.6
pads on no net: GPS.5 JTAG.6 microSD.7 SW1.1 SW1.4 U1.9 U1.10 U1.13 U1.16 U1.26 U1.44 U1.47 U1.48 U3.2 U3.4 U3.5 U3.6 U3.7 U3.12 U3.14 U3.16 U3.19 U3.21 U3.22 U4.4 U5.7 USB.4 USB.6 USB.18 USB.19

## Polygon pours and split planes (outlines as drawn)
3.3V on Top Layer "Bottom Layer-No Net" (solid, remove dead copper, pour order 18): 164.3,53.8 150.8,53.8 150.7,53.8 149.1,55.4 149,55.5 149,63.4 149,63.6 150.8,65.4 153.6,65.4 155.5,65.4 156.5,64.4 164,56.9 164.3,56.9
GND on Top Layer "Bottom Layer-No Net" (solid, remove dead copper, pour order 11): 110,80 165,80 165,35 110,35
GND on Bottom Layer "Bottom Layer-No Net" (solid, remove dead copper, pour order 9): 110,35 165,35 165,80 110,80

## Keep-outs
Keep-Out Layer:
  pour cut-out: 110,35 122.7,35 122.2,35.5 122.2,46.2 120.4,48 110.7,48 110,48.7
  pour cut-out: 143.7,60.2 147.1,60.2 147.1,56.7 143.7,56.7

## Silkscreen, mask and mechanical layers (free items; w line width, h text height)
Top Overlay:
  circle w0.127: c144.399,59.436 r0.254
  circle w0.127: c112.776,43.434 r0.254
  lines w0.254: 122.774,39.667 cw(c120,40) 122.779,39.71 ; 122.774,74.667 cw(c120,75) 122.779,74.71 ; 157.774,39.667 cw(c155,40) 157.779,39.71 ; 157.774,74.667 cw(c155,75) 157.779,74.71 ; 151.5,58 152.5,60 151.5,62 158,60 151.5,58
  lines w0.3: 159.385,53.086 160.02,52.451 160.02,55.626
  text "Siyao HU" at 110.617,78.613 h0.7
  text "Tong WU" at 110.617,77.089 h0.7
  text "Jiahao FANG" at 110.617,75.565 h0.7
  text "Xin YE" at 110.744,74.168 h0.7
Bottom Overlay:
  lines w0.254: 122.774,39.667 cw(c120,40) 122.779,39.71 ; 122.774,74.667 cw(c120,75) 122.779,74.71 ; 157.774,39.667 cw(c155,40) 157.779,39.71 ; 157.774,74.667 cw(c155,75) 157.779,74.71
  lines w0.3: 115.824,49.403 118.745,49.403 117.983,50.165 ; 117.221,41.783 116.459,42.545 119.888,42.545
Mechanical 1:
  the board outline again, w0.254